# Altium PCB ABA-52563-PCB.PcbDoc
Units mil, origin at the board's own origin, x right, y up, seen from the top; angles counter-clockwise.
Board outline 1180 x 1020 mil, 2 copper layers (Top Layer, Bottom Layer); 12 components, 6 nets, 55 pads, 36 vias.
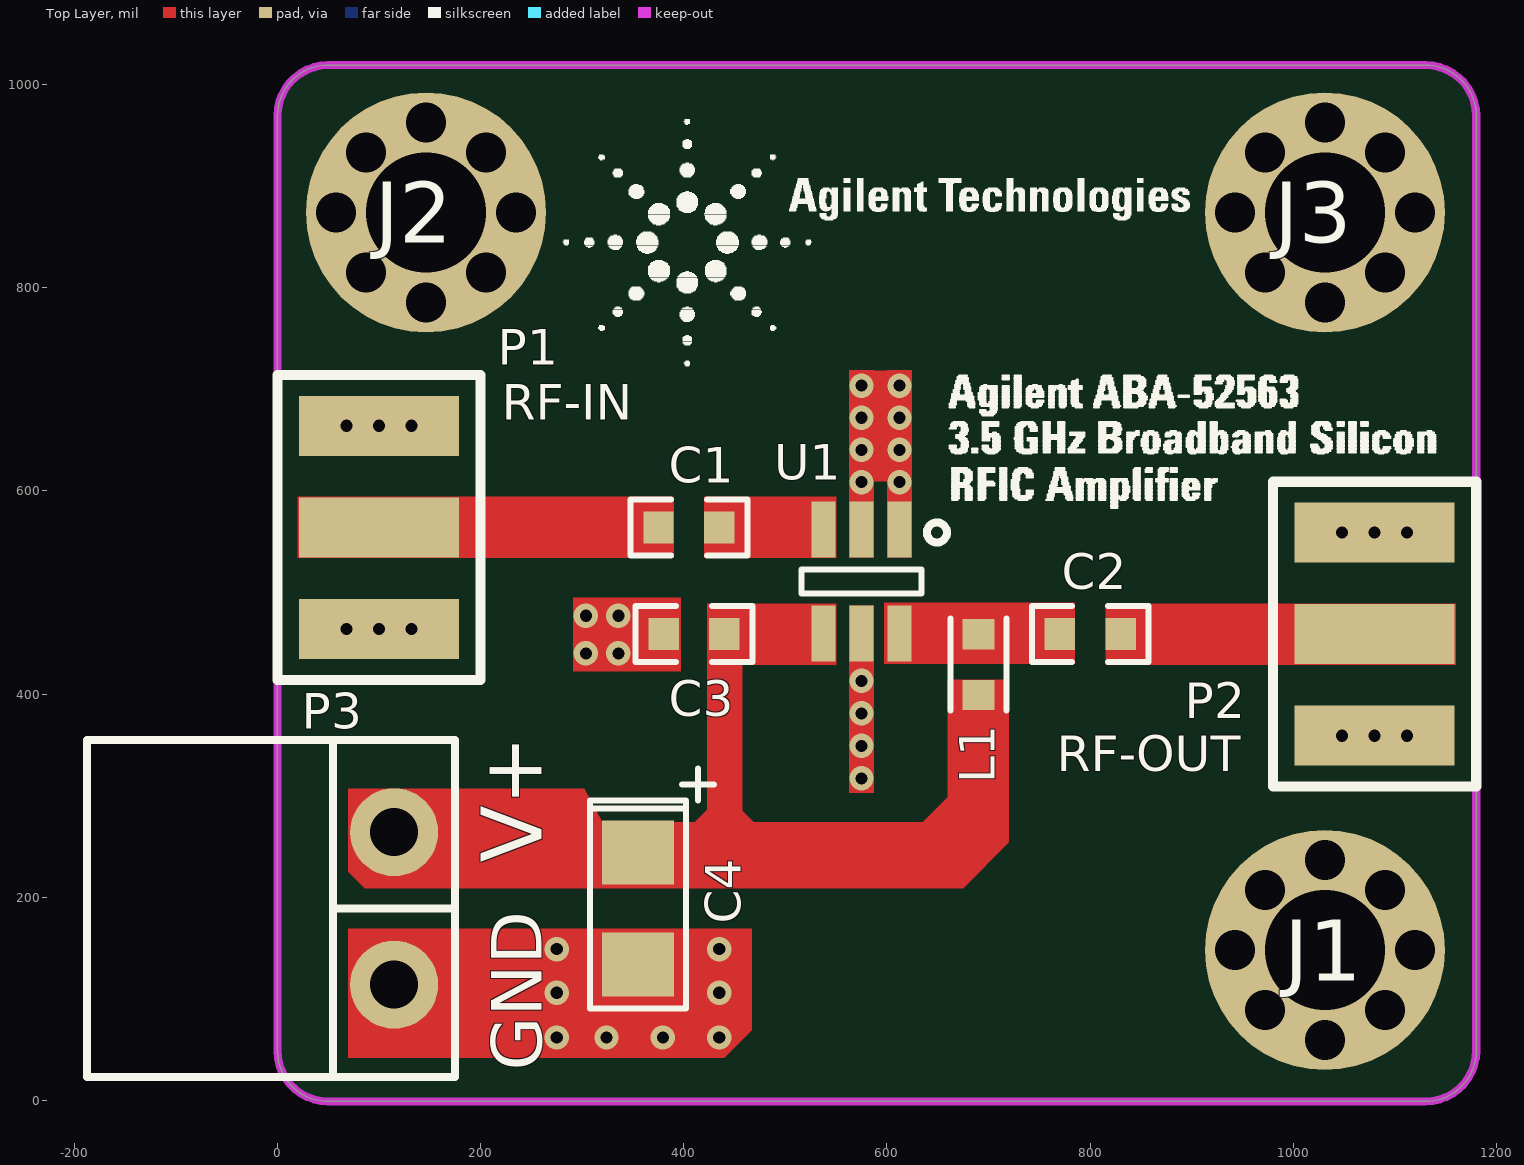
[diagram p0: Top Layer view]
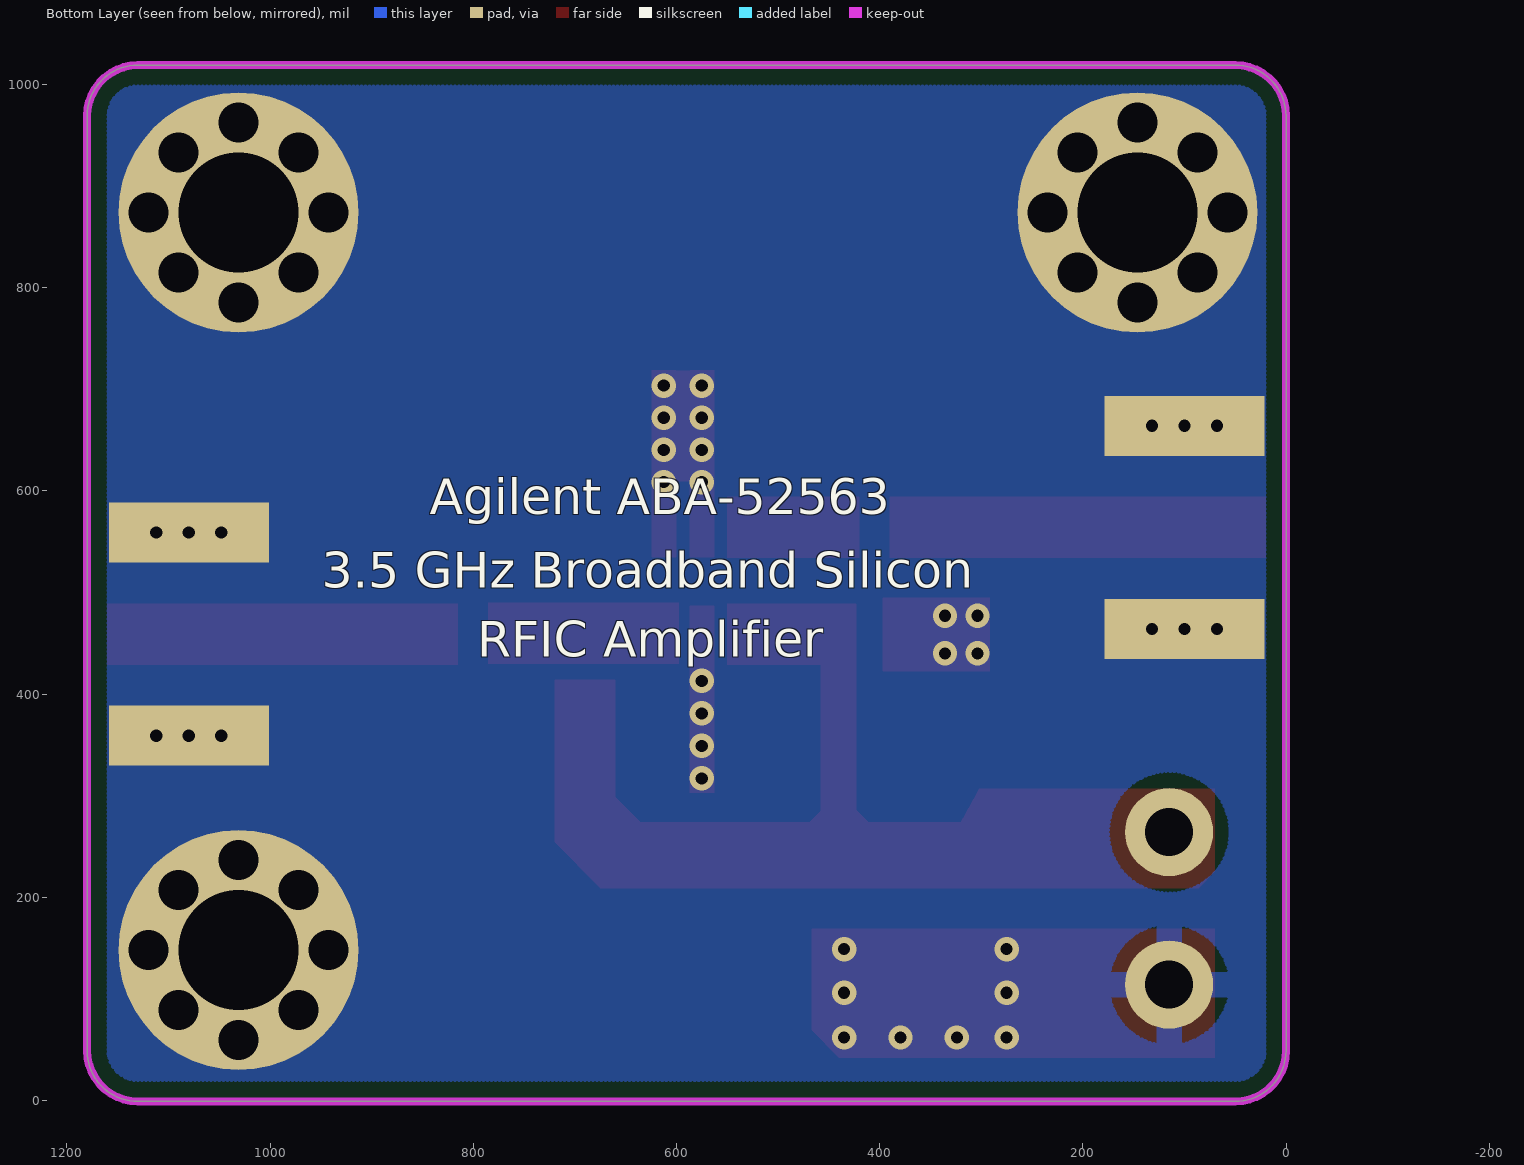
[diagram p1: Bottom Layer view, seen from below]

## Layer stack, top to bottom
Top Layer: signal copper 1.4
Dielectric: dielectric 12.6, FR-4, Dk 4.8
Bottom Layer: signal copper 1.4

## Board outline
0,49 0,969 cw(c50,969) 50,1019 1130,1019 cw(c1130,969) 1180,969 1180,49 cw(c1130,49) 1130,-1 50,-1 cw(c50,49)

## Design rules (kind name [scope] priority, off if disabled: settings)
Clearance Clearance_1 [inpoly] p1: gap=15
Clearance [All] p2: gap=10
PolygonConnect PolygonConnect_1 [InSMTComponent Or isvia  or incomponent('J1')  or incomponent('J2') or incomponent('J3')] p1: connectstyle=Direct reliefconductorwidth=10 reliefentries=4 polygonreliefangle="90 Angle"
PolygonConnect [All] p2: connectstyle=Relief reliefconductorwidth=25 reliefentries=4 polygonreliefangle="90 Angle"
RoutingVias [All] p1: holewidth=12 width=24 viastyle="Through Hole" minholewidth=12 minwidth=24 maxholewidth=12 maxwidth=24
SilkscreenOverComponentPads [All] p1: minsilkscreentomaskgap=10
SolderMaskExpansion [All] p1: expansion=2.5
Width [All] p1: maxlimit=60 minlimit=10 preferedwidth=30
27 further rules are at their usual default settings.

## Components (designator, comment, footprint, x,y, rotation, side; value= is the part's Value field where it differs from the comment)
C1 "1nF" 0603C 405.08,564 r0 top
C2 "1nF" 0603C 800.08,459 r0 top
C3 "1nF" 0603C 410.08,459 r180 top
C4 "10uF" 1206T 355,189 r270 top
J1 "Hole-3mmx6mm" Hole 1030.94,148.06 r0 top
J2 "Hole-3mmx6mm" Hole 146.42,874 r0 top
J3 "Hole-3mmx6mm" Hole 1030.94,874 r0 top
L1 "620nH" 0603L 690,429 r90 top
P1 "OUTPUT" SMA-SMD 100,564 r270 top
P2 "OUTPUT" SMA-SMD 1080,459 r90 top
P3 "Header 2" KF2EDG_3R81_2P 115,189 r90 top
U1 "ABA-52563" SOT23-6 575,510.81 r180 top

## Footprints (in the part's own frame and the unit in brackets; to place one, negate y for a bottom-side part, rotate by r counter-clockwise, add the part's x,y. Pads: shape width x height; smd on the part's side, far side on the other; paste and mask are expansions set on the pad)
0603C [mm]
  rect 0.76x0.8 smd: 1(-0.76,0) 2(0.76,0)
  silkscreen extent -1.46,-0.7 1.46,0.7
0603L [mm]
  rect 0.76x0.8 smd: 1(-0.76,0) 2(0.76,0)
  silkscreen extent -1.15,-0.7 1.15,0.7
1206T [mm]
  rect 1.6x1.8 smd: 1(-1.4,0) 2(1.4,0)
  silkscreen extent -3.5,-1.2 2.5,1.9
Hole [mm]
  round 6 hole 3: 0(0,0)
  round 1 hole 1: 1(-2.25,0) 1(-1.5,-1.5) 1(-1.5,1.5) 1(0,-2.25) 1(0,2.25) 1(1.5,-1.5) 1(1.5,1.5) 1(2.25,0)
  Top Layer pour cut-out: -2.997,0.008 -2.769,-1.139 -2.119,-2.112 -1.147,-2.762 0,-2.99 0,-2.99 1.147,-2.762 2.119,-2.112 2.769,-1.139 2.997,0.008 2.997,0.008 2.769,1.155 2.119,2.127 1.147,2.777 0,3.005 0,3.005 -1.147,2.777 -2.119,2.127 -2.769,1.155 -2.997,0.008
KF2EDG_3R81_2P [mm]
  round 2.2 hole 1.2: 1(-1.905,0) 2(1.905,0)
  silkscreen extent -4.21,-1.52 4.21,7.68
SMA-SMD [mm]
  rect 1.5x4 smd: 1(0,0) 2(-2.54,0) 2(2.54,0)
  rect 1.5x4 smd far side: 2(-2.54,0) 2(2.54,0)
  silkscreen extent -3.81,-2.54 3.81,2.54, body extent -3,-11.89 3,1.71, height 3.2
SOT23-6 [mm]
  rect 0.6x1.4 smd: 1(-0.95,-1.3) 2(0,-1.3) 3(0.95,-1.3) 4(0.95,1.3) 5(0,1.3) 6(-0.95,1.3)
  silkscreen extent -2.13,-1.47 1.5,0.3

## Part data
C1 C2 C3: library part Cap1, "CAP CER 10000PF 100V X7R 0603"
C4: library part Cap2, "CAP TANT 10UF 10V 10% 1206"
J1 J2 J3: library part HOLED
L1: library part Inductors, "FIXED IND 240NH 4.4A 22MOHM SMD"
P1 P2: library part BNC, "BNC Elbow Connector"
P3: "Header, 2-Pin"
U1: "Agilent ABA-52563  3.5 GHz Broadband Silicon  RFIC Amplifier"

## Via types
v1: diameter 24, hole 12, Top Layer to Bottom Layer, tented both sides, 36 vias

## Nets (pads, with @x,y where several pads share a name; then routed paths per layer and width w, separated by ;. In a path a pad name is that pad's centre, name@x,y a point inside that pad or via, vN(x,y) a via of type N, cw(c..) or ccw(c..) an arc to the next point about the centre after c; other vN are vias at no path point)
+5V: C3.1 C4.1 L1.1 P3.2 U1.4
GND: C3.2 C4.2 J1.0 J1.1 J2.0 J2.1 J3.0 J3.1 P1.2 P2.2 P3.1 U1.1 U1.2 U1.5
  other v1: 275,62 324,62 379.5,62 435,62 275,106 435,106 275,149 435,149 575,317 575,349 1048,359 1080,359 1112,359 575,381 575,413 303.68,440 335.68,440 68,464 100,464 132,464 303.68,477 335.68,477 1048,559 1080,559 1112,559 575,608.62 612.4,608.62 575,640.29 612.4,640.29 68,664 100,664 132,664 575,671.96 612.4,671.96 575,703.63 612.4,703.63
NetC1_1: C1.1 P1.1
NetC1_2: C1.2 U1.3
NetC2_1: C2.1 L1.2 U1.6
NetC2_2: C2.2 P2.1

## Polygon pours and split planes (outlines as drawn)
GND on Bottom Layer "BOT-GND" (hatched 90Degree grid 4 track 5, remove dead copper): 0,969 cw(c50,969) 50,1019 75,1019 1130,1019 cw(c1130,969) 1180,969 1180,49 cw(c1130,49) 1130,-1 50,-1 cw(c50,49) 0,49 0,58

## Keep-outs
Keep-Out Layer:
  the board outline again, w8

## Other copper
Top Layer:
  rectangle net +5V: 423,211 458,489
  rectangle net GND: 291.16,422 397.16,495
  rectangle net GND: 563,609.24 624.21,718.62
  region net +5V: 406.5,269.5 436.5,299.5 443.5,299.5 472.5,270.5 472.5,269.5
  region net +5V: 70,307 302,307 320,274 342,273 342,226 325,209 86,209 70,225
  region net GND: 70,169 467,169 467,69 440,42 70,42
  region net GND: 624.4,534.62 600.4,534.62 600.4,718.62 624.4,718.62
  region net GND: 587,534.62 563,534.62 563,718.62 587,718.62
  region net GND: 563,487 587,487 587,303 563,303
  region net +5V: 320,274 635,274 671,310 720,310 720,254 675,209 320,209
  region net +5V: 660,299 660,413.92 720,413.92 720,299
  region net +5V: 550,429 425.16,429 425.16,489 550,489
  region net NetC2_2: 1160,429 815.16,429 815.16,489 1160,489
  region net NetC2_1: 785,429.63 597.56,429.63 597.56,489.63 785,489.63
  region net NetC1_2: 550,534 420.16,534 420.16,594 550,594
  region net NetC1_1: 20,594 390,594 390,534 20,534

## Silkscreen, mask and mechanical layers (free items; w line width, h text height)
Top Overlay:
  drawing of 3026 lines, arcs and shapes, not listed
  text "RF-IN" at 221,658 h60
  text "RF-OUT" at 767,312 h60
Bottom Overlay:
  text "Agilent ABA-52563" at 843,565 h60
  text "3.5 GHz Broadband Silicon" at 949,493 h60
  text "RFIC Amplifier" at 796,425 h60

## Dimensions
0,969 to 1180,969 on Mechanical 1
1130,1019 to 1130,-1 on Mechanical 1

## Text inside footprints (layer, text, board x,y; h text height)
P3: Top Overlay "V+" at 260,234 h60 r90; Top Overlay "GND" at 260,29 h50 r90